# Altium PCB NCU140_Keyboard_V3.PcbDoc
Units mm, origin at the board's own origin, x right, y up, seen from the top; angles counter-clockwise.
Board outline 27.81 x 14.6 mm, 2 copper layers (Top Layer, Bottom Layer); 19 components, 18 nets, 104 pads, 33 vias.
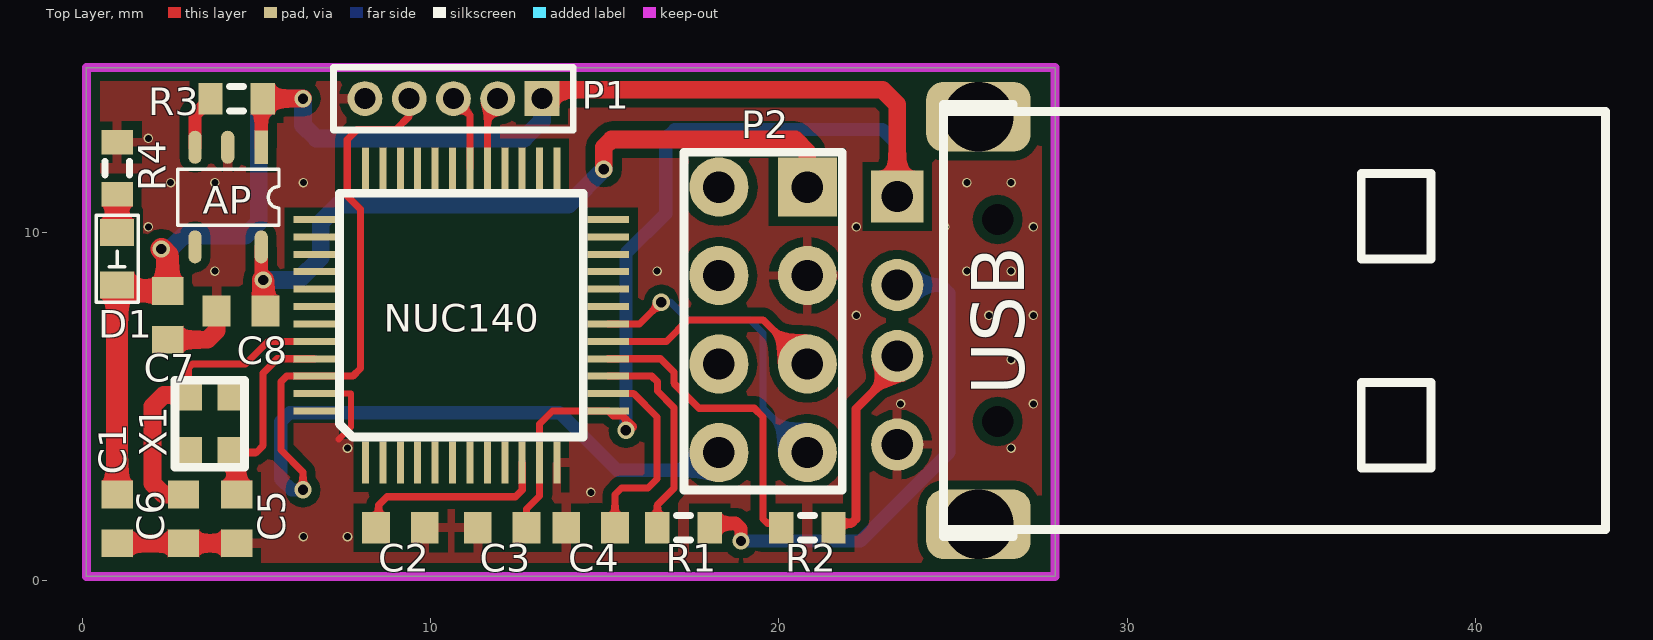
[diagram p0: Top Layer view]
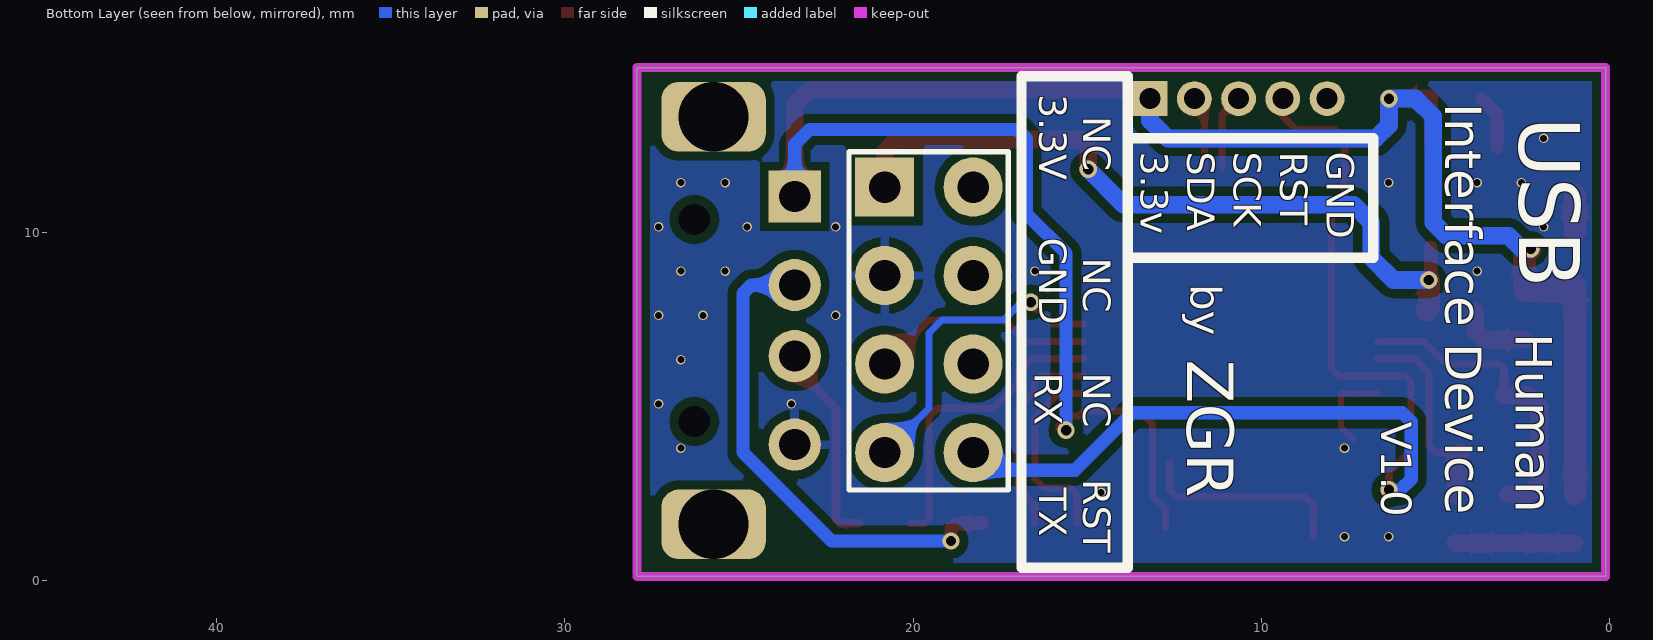
[diagram p1: Bottom Layer view, seen from below]

## Layer stack, top to bottom
Top Solder: solder mask 0.0102, Solder Resist, Dk 3.5
Top Layer: signal copper 0.0356
Dielectric 1: dielectric 0.32, FR-4, Dk 4.8
Bottom Layer: signal copper 0.0356
Bottom Solder: solder mask 0.0102, Solder Resist, Dk 3.5

## Board outline
0.127,0.127 27.932,0.127 27.932,14.732 0.127,14.732

## Design rules (kind name [scope] priority, off if disabled: settings)
Clearance [All] p1: gap=0.254 ignorepadtopadclearanceinfootprint=FALSE except(0: Arc-Hole Track-Hole SMDPad-Hole THPad-Hole Via-Hole Fill-Hole Poly-Hole Region-Hole Text-Hole)
PolygonConnect [All] p1: connectstyle=Relief reliefconductorwidth=0.254 reliefentries=4 polygonreliefangle="90 Angle" airgapwidth=0.254
RoutingVias [All] p1: holewidth=0.711 width=1.27 viastyle="Through Hole" minholewidth=0.4 minwidth=0.9 maxholewidth=0.711 maxwidth=1.27
SolderMaskExpansion [All] p1: expansion=0.102
Width [All] p1: maxlimit=1.27 minlimit=0.178 preferedwidth=0.254 minimp=50.000000 maximp=50.000000 favimp=50.000000
30 further rules are at their usual default settings.

## Components (designator, comment, footprint, x,y, rotation, side; value= is the part's Value field where it differs from the comment)
AP "AP2112" SOT-23-5 5.653,11.816 r270 top
C1 "" 1608[0603] 1.008,1.778 r90 top value=0.1uF
C2 "" 1608[0603] 9.136,1.524 r180 top value=10uF
C3 "" 1608[0603] 12.057,1.524 r0 top value=0.1uF
C4 "" 1608[0603] 14.597,1.524 r0 top value=1uF
C5 "" 1608[0603] 4.437,1.778 r90 top value=22p
C6 "" 1608[0603] 2.913,1.778 r90 top value=22p
C7 "Cap Semi" 1608[0603] 2.455,7.62 r90 top value=1uf
C8 "Cap Semi" 1608[0603] 4.564,7.747 r0 top value=1uf
D1 "LED" SMD-0603_LED 1.008,8.492 r90 top
NUC140 "NUC140_48Pin" HLQFP-48(7mm*7mm) 7.385,11.124 r0 top (schematic designator NUC140_48Pin)
P1 "MHDR1X5" MHDR1X5 13.2,13.843 r180 top
P2 "Head_4x2" Header_2.54_4*2 20.82,11.303 r270 top
R1 "" J1-0603 17.264,1.524 r180 top value=22
R2 "" J1-0603 20.82,1.524 r180 top value=22
R3 "Res3" J1-0603 4.437,13.843 r0 top value=100k
R4 "" J1-0603 1.008,11.844 r270 top value=330
USB "USB_2.0_P" USB_Type-A_P_Thru-Hole 43.731,1.472 r180 top (schematic designator USB_2.0_P)
X1 "Xtal" 2520S 4.29,5.334 r270 top

## Footprints (in the part's own frame and the unit in brackets; to place one, negate y for a bottom-side part, rotate by r counter-clockwise, add the part's x,y. Pads: shape width x height; smd on the part's side, far side on the other; paste and mask are expansions set on the pad)
1608[0603] [mm] "Chip Capacitor, Body 1.6x0.8mm, IPC High Density"
  rect 0.8x0.9 smd: 1(-0.7,0) 2(0.7,0)
  body extent -0.87,-0.48 0.87,0.48, height 1.3
2520S [mm]
  rect 0.9x0.8 smd: 1(0,-1.25) 2(1.65,0) ""(0,0) ""(1.65,-1.25)
  silkscreen extent -0.43,-1.63 2.07,0.37
Header_2.54_4*2 [mm]
  round 1.7 hole 0.9: 1(0,-2.54) 2(2.54,-2.54) 3(5.08,-2.54) 4(7.62,-2.54) 5(7.62,0) 6(5.08,0) 7(2.54,0)
  rect 1.7x1.7 hole 0.9: 8(0,0)
  silkscreen extent -1,-3.54 8.7,1
HLQFP-48(7mm*7mm) [mm]
  rect 0.2x1.2 smd: 1(0.75,-7.73) 2(1.25,-7.73) 3(1.75,-7.73) 4(2.25,-7.73) 5(2.75,-7.73) 6(3.25,-7.73) 7(3.75,-7.73) 8(4.25,-7.73) 9(4.75,-7.73) 10(5.25,-7.73) 11(5.75,-7.73) 12(6.25,-7.73) 25(6.25,0.72) 26(5.75,0.72) 27(5.25,0.72) 28(4.75,0.72) 29(4.25,0.72) 30(3.75,0.72) 31(3.25,0.72) 32(2.75,0.72) 33(2.25,0.72) 34(1.75,0.72) 35(1.25,0.72) 36(0.75,0.72)
  rect 1.2x0.2 smd: 13(7.72,-6.25) 14(7.72,-5.75) 15(7.72,-5.25) 16(7.72,-4.75) 17(7.72,-4.25) 18(7.72,-3.75) 19(7.72,-3.25) 20(7.72,-2.75) 21(7.72,-2.25) 22(7.72,-1.75) 23(7.72,-1.25) 24(7.72,-0.75) 37(-0.72,-0.75) 38(-0.72,-1.25) 39(-0.72,-1.75) 40(-0.72,-2.25) 41(-0.72,-2.75) 42(-0.72,-3.25) 43(-0.72,-3.75) 44(-0.72,-4.25) 45(-0.72,-4.75) 46(-0.72,-5.25) 47(-0.72,-5.75) 48(-0.72,-6.25)
  silkscreen extent 0,-7 7,0
J1-0603 [mm] "Chip Resistor, Body 1.6x0.8mm, IPC High Density"
  rect 0.7x0.9 smd: 1(-0.75,0) 2(0.75,0)
  silkscreen extent -0.2,-0.35 0.2,0.35, body extent -0.85,-0.48 0.85,0.48, height 0.9
MHDR1X5 [mm] "Connector; Header; 5 Position"
  rect 1x1 hole 0.6: 1(0,0)
  round 1 hole 0.6: 2(1.27,0) 3(2.54,0) 4(3.81,0) 5(5.08,0)
  silkscreen extent -0.9,-0.9 5.98,0.9
SMD-0603_LED [mm]
  rect 0.78x0.98 smd: 1(0,0) 2(1.51,0)
  silkscreen extent -0.5,-0.6 2,0.6
SOT-23-5 [mm]
  rect 0.95x0.38 smd: 1(-0.63,-0.51)
  oval 0.95x0.38 smd: 2(-0.63,-1.47) 3(-0.63,-2.41) 4(2.23,-2.41) 5(2.23,-0.51)
  silkscreen extent 0,-2.91 1.61,0
USB_Type-A_P_Thru-Hole [mm]
  rect 1.5x1.5 hole 0.9: 1(20.33,-9.56)
  round 1.5 hole 0.9: 2(20.33,-7.02) 3(20.33,-4.98) 5(20.33,-2.44)
  round 0 hole 0.9: ""(17.45,-8.9) ""(17.45,-3.1)
  rrect50% 3x2 hole 2: ""(18,-0.15) ""(18,-11.85)
  silkscreen extent 0,-12.2 19,0.2

## Part data
C1 C2 C3 C4 C5 C6: library part "Cap Semi", "Capacitor (Semiconductor SIM Model)", LatestRevisionDate=29-May-2009, LatestRevisionNote="IPC-7351 Footprint Added.", PackageDescription="Chip Capacitor", PackageReference=C1206, Published=8-Jun-2000, Publisher="Altium Limited"
C7 C8: "Capacitor (Semiconductor SIM Model)", LatestRevisionDate=29-May-2009, LatestRevisionNote="IPC-7351 Footprint Added.", PackageDescription="Chip Capacitor", PackageReference=C1206, Published=8-Jun-2000, Publisher="Altium Limited"
P1: "Header, 5-Pin", LatestRevisionDate=17-Jul-2002, LatestRevisionNote="Re-released for DXP Platform.", Publisher="Altium Limited"
R1 R2 R4: library part Res3, "Resistor", LatestRevisionDate=29-May-2009, LatestRevisionNote="IPC-7351 Footprint Added.", PackageDescription="Chip Resistor", PackageReference=J1-0603, Published=8-Jun-2000, Publisher="Altium Limited"
R3: "Resistor", LatestRevisionDate=29-May-2009, LatestRevisionNote="IPC-7351 Footprint Added.", PackageDescription="Chip Resistor", PackageReference=J1-0603, Published=8-Jun-2000, Publisher="Altium Limited"

## Via types
v1: diameter 0.275, hole 0.2, Top Layer to Bottom Layer, tented both sides, 25 vias
v2: diameter 0.5, hole 0.3, Top Layer to Bottom Layer, tented both sides, 8 vias

## Nets (pads, with @x,y where several pads share a name; then routed paths per layer and width w, separated by ;. In a path a pad name is that pad's centre, name@x,y a point inside that pad or via, vN(x,y) a via of type N, cw(c..) or ccw(c..) an arc to the next point about the centre after c; other vN are vias at no path point)
3.3V: AP.5 C8.2 P2.8 | length 21.3
  Top Layer w0.381: AP.5 5.143,8.692 v2(5.199,8.636)
  Top Layer w0.508: v2(14.978,11.811) 14.978,12.446 15.2,12.668 20.471,12.668 20.82,12.319 P2.8
  Top Layer w0.635: v2(5.199,8.636) 5.199,7.812 C8.2
  Bottom Layer w0.508: v2(5.199,8.636) 6.215,8.636 6.85,9.271 6.85,10.287 7.358,10.795 13.962,10.795 v2(14.978,11.811)
5V: AP.1 C1.2 C3.2 C7.2 D1.1 NUC140.11 NUC140.13 P1.1 R3.2 USB.1 | length 64.5
  Top Layer w0.203: C3.2 12.757,2.061 13.135,2.439 NUC140.11 13.135,4.507 13.502,4.874 NUC140.13 15.244,4.735 15.522,4.735 15.835,4.422 15.731,4.318 v2(15.613,4.318)
  Top Layer w0.381: AP.1 5.143,13.799 R3.2
  Top Layer w0.508: R3.2 v2(6.342,13.843) ; P1.1 13.454,14.097 22.979,14.097 23.401,13.675 USB.1
  Top Layer w0.635: C1.2 D1.1 1.18,8.32 C7.2 2.455,9.348 v2(2.278,9.525)
  Bottom Layer w0.381: v2(15.613,4.318) 15.613,9.398 16.756,10.541 16.756,12.7 17.01,12.954 22.979,12.954 23.401,12.532 USB.1
  Bottom Layer w0.508: v2(2.278,9.525) 2.532,9.525 2.913,9.906 4.691,9.906 5.072,10.287 5.072,13.335 5.58,13.843 v2(6.342,13.843) 6.342,13.081 6.723,12.7 12.692,12.7 13.2,13.208 P1.1
D+: NUC140.16 R2.2 | length 8.8
  Top Layer w0.203: NUC140.16 16.605,6.374 16.986,5.993 16.986,5.673 17.706,4.953 19.296,4.953 19.55,4.699 19.55,1.778 19.677,1.651 R2.2@20.07,1.651
D-: NUC140.15 R1.2 | length 5.9
  Top Layer w0.203: NUC140.15 16.355,5.874 16.514,5.715 16.514,5.449 16.986,4.977 16.986,2.655 16.514,2.183 R1.2@16.514,1.651
GND: AP.2 C1.1 C2.1 C3.1 C4.1 C5.1 C6.1 C7.1 C8.1 NUC140.12 NUC140.47 P1.5 P2.7 R4.1 USB.5 | length 8
  Top Layer w0.178: NUC140.47 7.723,5.374 7.723,4.421 7.366,4.064
  Top Layer w0.508: C1.1 C6.1 C5.1 ; C7.1 3.6,6.92 3.864,7.184 C8.1
  other v1: 6.35,1.27 7.62,1.27 14.605,2.54 7.62,3.81 26.67,3.81 23.495,5.08 27.305,5.08 26.67,6.35 22.225,7.62 26.035,7.62 27.305,7.62 3.81,8.89 16.51,8.89 25.4,8.89 26.67,8.89 1.905,10.16 22.225,10.16 24.765,10.16 27.305,10.16 2.54,11.43 3.81,11.43 6.35,11.43 25.4,11.43 26.67,11.43 1.905,12.7
GPB0: NUC140.17 P2.6 | length 6.5
  Top Layer w0.203: NUC140.17 16.772,6.874 17.391,7.493 19.55,7.493 P2.6
GPB1: NUC140.18 P2.5 | length 9
  Top Layer w0.203: NUC140.18 16.002,7.374 v2(16.629,8.001)
  Bottom Layer w0.203: v2(16.629,8.001) 16.883,8.001 17.391,7.493 19.169,7.493 19.55,7.112 19.55,4.953 P2.5
ICE_CLK: NUC140.30 P1.3 | length 2.2
  Top Layer w0.203: P1.3 11.135,13.368 NUC140.30
ICE_DATA: NUC140.29 P1.2 | length 2.1
  Top Layer w0.203: NUC140.29 11.635,13.548 P1.2
NetAP_3: AP.3 R3.1 | length 1.6
  Top Layer w0.381: AP.3 3.243,13.399 R3.1
NetC2_2: C2.2 NUC140.10 | length 6
  Top Layer w0.203: C2.2@8.513,1.27 8.513,2.171 8.755,2.413 12.438,2.413 12.635,2.61 NUC140.10
NetC4_2: C4.2 NUC140.14 | length 5.7
  Top Layer w0.203: NUC140.14 15.835,5.374 16.502,4.707 16.502,2.921 16.248,2.667 15.486,2.667 15.297,2.478 C4.2@15.297,1.651
NetD1_2: D1.2 R4.2 | length 1.1
  Top Layer w0.635: D1.2 R4.2
NetR1_1: R1.1 USB.2 | length 14.5
  Top Layer w0.381: R1.1@18.014,1.651 18.759,1.651 18.915,1.495 v2(18.915,1.143)
  Bottom Layer w0.381: v2(18.915,1.143) 22.344,1.143 24.884,3.683 24.884,8.255 24.647,8.492 USB.2
NetR2_1: R2.1 USB.3 | length 5.9
  Top Layer w0.254: R2.1@21.57,1.651 22.09,1.651 22.217,1.778 22.217,4.941 23.401,6.125 USB.3
RESET: NUC140.46 P1.4 P2.4 | length 31.1
  Top Layer w0.203: v2(6.342,2.61) 6.342,3.118 5.707,3.753 5.707,5.715 5.866,5.874 NUC140.46 7.771,5.874 7.993,6.096 7.993,10.668 7.612,11.049 7.612,12.668 7.898,12.954 9.009,12.954 9.39,13.335 P1.4
  Bottom Layer w0.381: v2(6.342,2.61) 6.018,2.61 5.707,2.921 5.707,4.572 5.961,4.826 13.708,4.826 15.359,3.175 17.772,3.175 P2.4
XI: C5.2 NUC140.45 X1.2 | length 6
  Top Layer w0.203: X1.2 5.003,3.684 5.199,3.88 5.199,5.969 5.604,6.374 NUC140.45
  Top Layer w0.508: X1.2 4.437,3.537 C5.2
XO: C6.2 NUC140.44 X1.1 | length 9.1
  Top Layer w0.203: X1.1 3.04,6.096 3.167,6.223 4.691,6.223 5.342,6.874 NUC140.44
  Top Layer w0.508: C6.2 2.34,2.478 2.024,2.794 2.024,5.014 2.344,5.334 X1.1
pads on no net: AP.4 NUC140.1 NUC140.2 NUC140.3 NUC140.4 NUC140.5 NUC140.6 NUC140.7 NUC140.8 NUC140.9 NUC140.19 NUC140.20 NUC140.21 NUC140.22 NUC140.23 NUC140.24 NUC140.25 NUC140.26 NUC140.27 NUC140.28 NUC140.31 NUC140.32 NUC140.33 NUC140.34 NUC140.35 NUC140.36 NUC140.37 NUC140.38 NUC140.39 NUC140.40 NUC140.41 NUC140.42 NUC140.43 NUC140.48 P2.1 P2.2 P2.3 USB. X1.

## Polygon pours and split planes (outlines as drawn)
GND on Bottom Layer "GND_L02_P062" (solid, remove dead copper, pour order 62): 0.127,14.732 0.127,0.127 27.932,0.127 27.932,14.732
no net on Bottom Layer "NONET_L02_P060" (solid, remove dead copper, pour order 60): 0.127,14.732
GND on Top Layer "GND_L01_P066" (solid, remove dead copper, pour order 66): 0.127,14.732 0.127,0.127 27.932,0.127 27.932,14.732

## Keep-outs
Keep-Out Layer:
  the board outline again, w0.254

## Other copper
Top Layer:
  pour cut-out: 7.366,11.176 14.478,11.176 14.478,4.064 7.366,4.064

## Silkscreen, mask and mechanical layers (free items; w line width, h text height)
Bottom Overlay:
  lines w0.15: 17.272,2.61 21.844,2.61 21.844,12.319 17.272,12.319 17.272,2.61
  lines w0.3: 13.843,9.652 13.843,9.271 6.794,9.271 6.794,12.7 13.843,12.7 ; 13.843,0.381 13.843,14.478 16.891,14.478 16.891,0.381 13.843,0.381
  text "3.3V" at 16.383,13.97 h0.8 r90
  text "Interface Device" at 5.068,13.716 h1.8 r90
  text "NC" at 15.113,13.335 h0.8 r90
  text "USB" at 3.175,13.322 h3 r90
  text "GND" at 8.128,12.319 h0.8 r90
  text "RST" at 9.461,12.319 h0.8 r90
  text "SCK" at 10.795,12.319 h0.8 r90
  text "SDA" at 12.128,12.319 h0.8 r90
  text "3.3v" at 13.462,12.319 h0.8 r90
  text "GND" at 16.383,9.855 h0.8 r90
  text "NC" at 15.113,9.271 h0.8 r90
  text "by" at 12.319,8.509 h1.5 r90
  text "Human" at 3.048,7.112 h1.8 r90
  text "ZGR" at 12.573,6.35 h2.3 r90
  text "NC" at 15.113,5.969 h0.8 r90
  text "RX" at 16.51,5.969 h0.8 r90
  text "V1.0" at 6.858,4.572 h1.5 r90
  text "RST" at 15.113,2.921 h0.8 r90
  text "TX" at 16.383,2.667 h0.8 r90